# Altium PCB Strathim PCB V1.0 (1 try).PcbDoc (part 1 of 2)
Units mm, origin at the board's own origin, x right, y up, seen from the top; angles counter-clockwise.
Board outline 35 x 35 mm, 6 copper layers (Component Side, Ground Plane (GND), Inner Layer 1, Inner Layer 2, Power Plane (VCC), Solder Side), stack 1.297 mm thick; 113 components, 148 nets, 686 pads, 197 vias.
Unrouted connection lines stored in the file: 260.
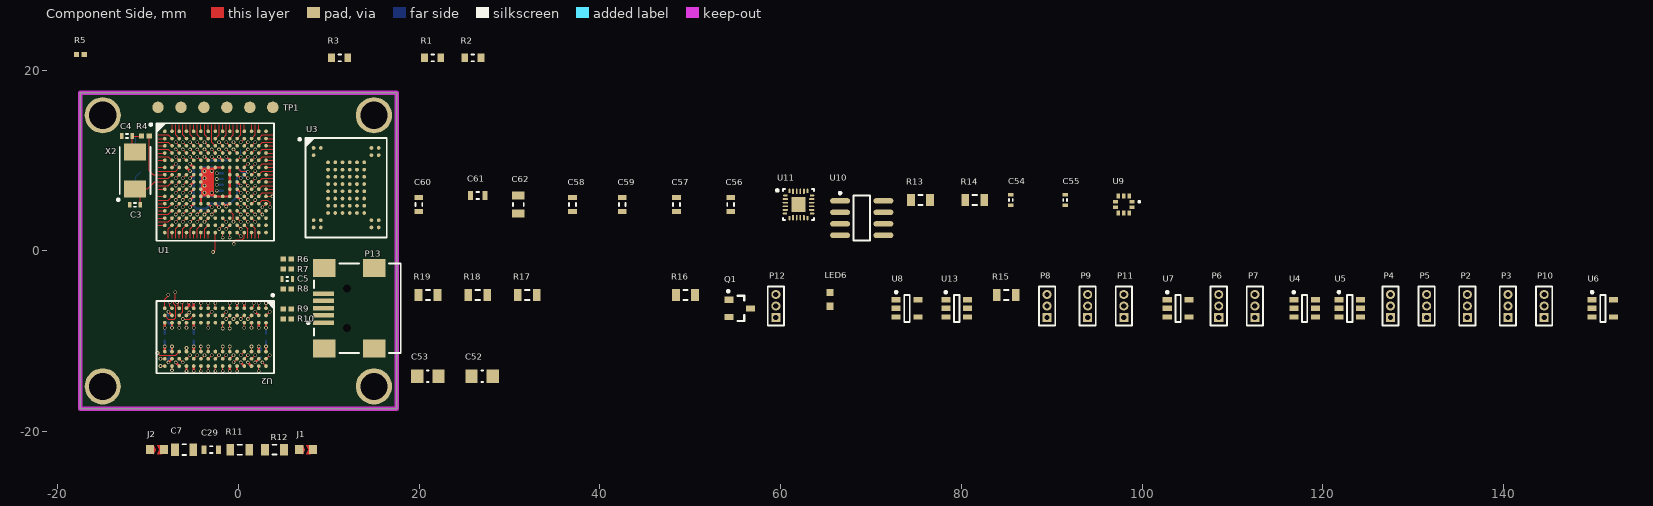
[diagram p0: Component Side view]
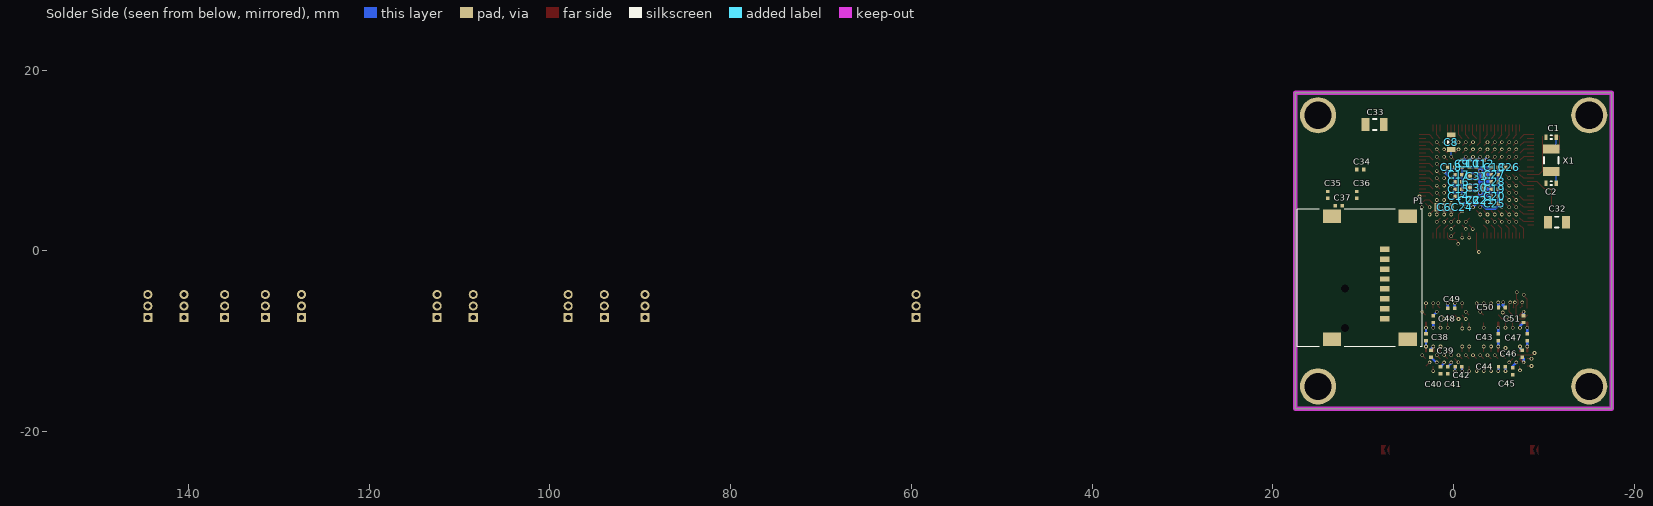
[diagram p1: Solder Side view, seen from below]
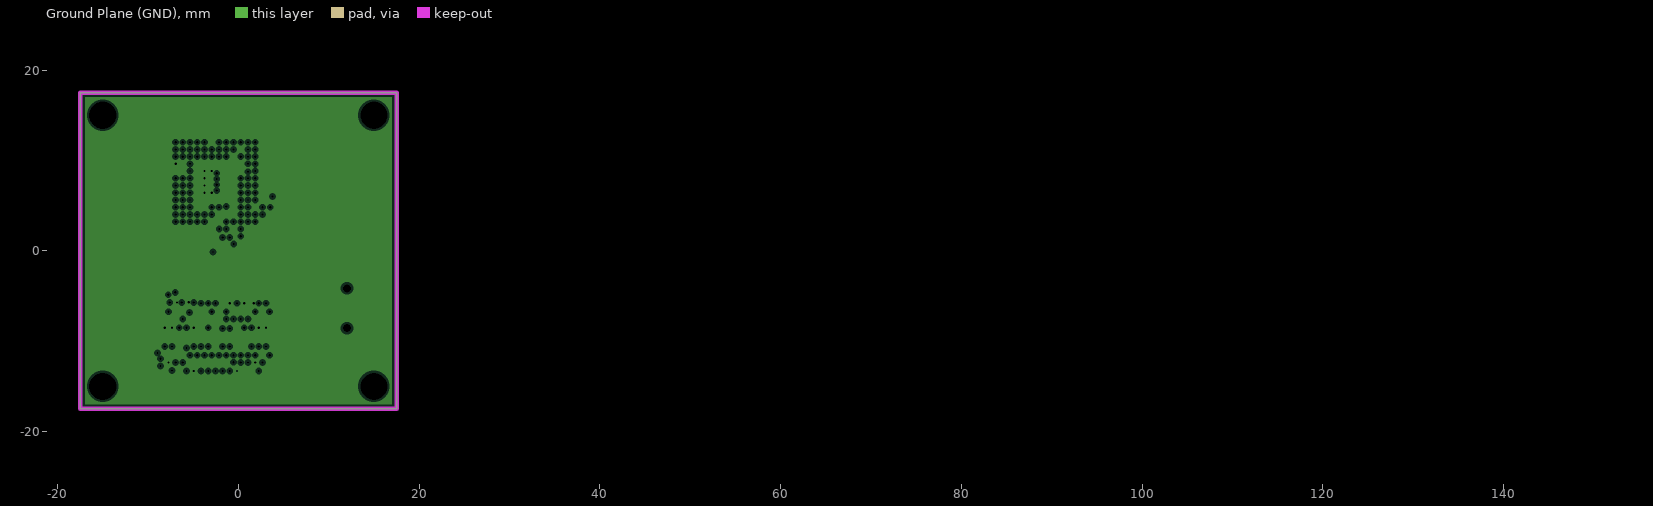
[diagram p2: Ground Plane (GND), clearances drawn from the general rule]
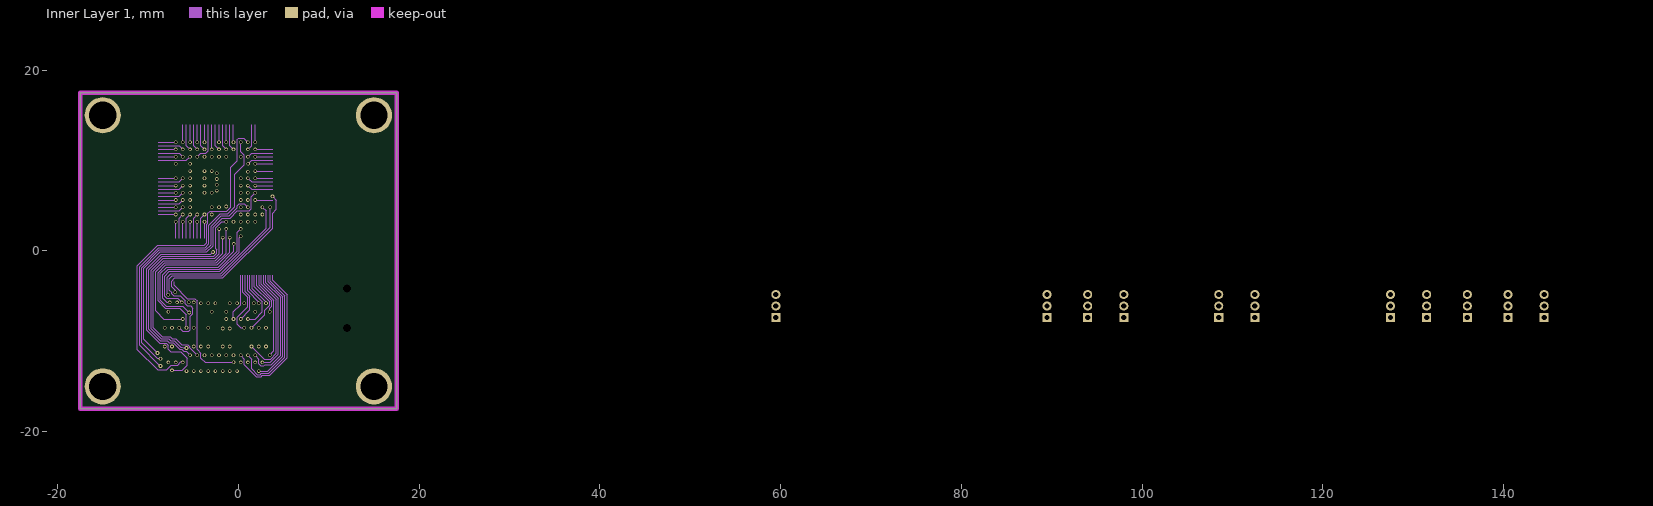
[diagram p3: Inner Layer 1]
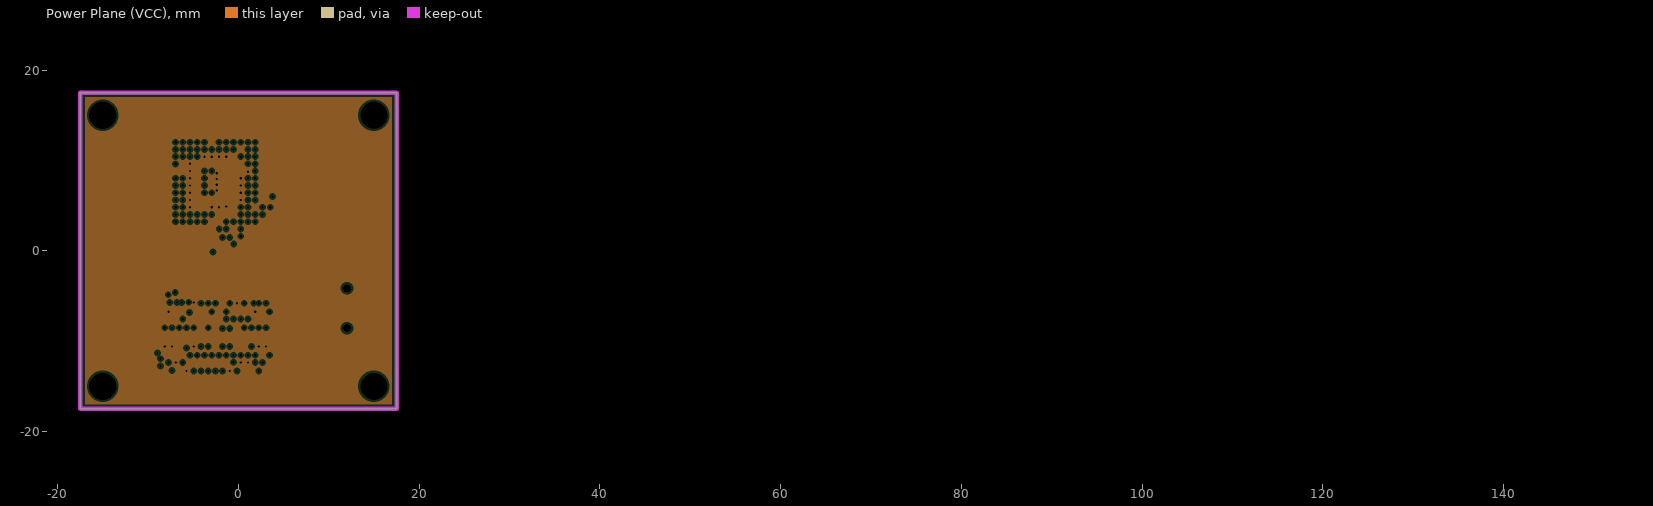
[diagram p4: Power Plane (VCC), clearances drawn from the general rule]

## Layer stack, top to bottom
Top Solder: solder mask 0.0102, Solder Resist, Dk 3.5
Component Side: signal copper 0.0356
Dielectric 1: core 0.32, FR-4, Dk 4.8
Ground Plane (GND): plane copper 0.036, net GND
Dielectric 3: prepreg 0.127, Dk 4.2
Inner Layer 1: signal copper 0.036
Dielectric 6: core 0.254, Dk 4.2
Inner Layer 2: signal copper 0.036
Dielectric 5: prepreg 0.127, Dk 4.2
Power Plane (VCC): plane copper 0.036, net +3V3
Dielectric 4: core 0.254, Dk 4.2
Solder Side: signal copper 0.0356
Bottom Solder: solder mask 0.0102, Solder Resist, Dk 3.5

## Board outline
-17.5,-17.5 17.5,-17.5 17.5,17.5 -17.5,17.5

## Design rules (kind name [scope] priority, off if disabled: settings)
Clearance [All] p1: gap=0.12
DiffPairsRouting [All] p1: maxlimit=0.254 minlimit=0.254 mostfreqgap=0.254 toplayer_minwidth=0.381 toplayer_maxwidth=0.381 toplayer_prefwidth=0.381 midlayer1_minwidth=0.381 midlayer1_maxwidth=0.381 midlayer1_prefwidth=0.381 midlayer2_minwidth=0.381 midlayer2_maxwidth=0.381 midlayer2_prefwidth=0.381 bottomlayer_minwidth=0.381 bottomlayer_maxwidth=0.381 bottomlayer_prefwidth=0.381 maxuncoupledlength=12.7
PlaneClearance [All] p1: clearance=0.25
PlaneConnect [All] p1: planeconnectstyle=Direct reliefexpansion=0.508 reliefentries=4 reliefconductorwidth=0.254 reliefairgap=0.254
PolygonConnect PolygonConnect_GND [InNet('GND') vs IsVia] p1: connectstyle=Direct reliefconductorwidth=0.254 reliefentries=4 polygonreliefangle="90 Angle" airgapwidth=0.254
PolygonConnect [All] p2: connectstyle=Relief reliefconductorwidth=0.254 reliefentries=4 polygonreliefangle="90 Angle" airgapwidth=0.254
RoutingVias [All] p1: holewidth=0.2 width=0.4 viastyle="Through Hole" minholewidth=0.25 minwidth=0.4 maxholewidth=0.4 maxwidth=0.8
SolderMaskExpansion [All] p1: expansion=0.102
Width [All] p1: maxlimit=2 minlimit=0.12 preferedwidth=0.12
27 further rules are at their usual default settings.

## Classes and differential pairs
component class MCU: C1 C2 C3 C4 C5 C? P1 R1 R2 R3 R4 R5 R6 R7 R8 R9 R10 R? TP1 U1 X1 X2 X?
component class RAM: C34 C35 C36 C37 C38 C39 C40 C41 C42 C43 C44 C45 C46 C47 C48 C49 C50 C51 C52 C53 U2 U3
net class RAM: NAND_ALE NAND_CLE NAND_NCE NAND_NR/B NAND_NRE NAND_NWE NAND_NWP NetC4_2 NetR4_1 QUADSPI_BK1_IO2 RAM_ADDR0 RAM_ADDR1 RAM_ADDR2 RAM_ADDR3 RAM_ADDR4 RAM_ADDR5 RAM_ADDR6 RAM_ADDR7 RAM_ADDR8 RAM_ADDR9 RAM_ADDR10 RAM_ADDR11 RAM_I/O0 RAM_I/O1 RAM_I/O2 RAM_I/O3 RAM_I/O4 RAM_I/O5 RAM_I/O6 RAM_I/O7 RAM_I/O8 RAM_I/O9 RAM_I/O10 RAM_I/O11 RAM_I/O12 RAM_I/O13 RAM_I/O14 RAM_I/O15 RAM_I/O16 RAM_I/O17 RAM_I/O18 RAM_I/O19 RAM_I/O20 RAM_I/O21 RAM_I/O22 RAM_I/O23 RAM_I/O24 RAM_I/O25 RAM_I/O26 RAM_I/O27 RAM_I/O28 RAM_I/O29 RAM_I/O30 RAM_I/O31 SDRAM_BA0 SDRAM_BA1 SDRAM_CKE SDRAM_CLK SDRAM_DQM0 SDRAM_DQM1 SDRAM_DQM2 SDRAM_DQM3 SDRAM_NCAS SDRAM_NCS SDRAM_NRAS
net class SDMMC: SDMMC_CK SDMMC_CMD SDMMC_D0 SDMMC_D1 SDMMC_D2 SDMMC_D3
component class PWR: C6 C7 C8 C9 C10 C11 C12 C13 C14 C15 C16 C17 C18 C19 C20 C21 C22 C23 C24 C25 C26 C27 C28 C29 C30 C31 C32 C33 C? J1 J2 J? R11 R12
component class Connectors: LED6 P2 P3 P4 P5 P6 P7 P8 P9 P10 P11 P12 P13 Q1 R15 R16 R17 R18 R19 U4 U5 U6 U7 U8 U13
component class IMU: C54 C55 C56 C57 C58 C59 C60 C61 C62 R13 R14 U9 U10 U11 U12
net class TWI: EEPROM_NWC I2C1_SCL I2C1_SDA
differential pair USB_HS: +USB_HS_P -USB_HS_N
differential pair USBCON: +USBCON_P -USBCON_N

## Components (designator, comment, footprint, x,y, rotation, side; value= is the part's Value field where it differs from the comment)
C1 "ChipCap 12 NP0" CAP0402 -10.795,12.573 r180 bottom
C2 "ChipCap 12 NP0" CAP0402 -10.795,7.493 r180 bottom
C3 "ChipCap 18 NP0" CAP0402 -11.43,5.08 r0 top
C4 "ChipCap 18 NP0" CAP0402 -12.319,12.7 r0 top
C5 "ChipCap 0.1u X7R" CAP0402 5.41,-3.12 r0 top
C6 "ChipCap 22u X7R" CAP0603 1.06,4.82 r180 bottom
C7 "ChipCap 22u X7R" CAP0805#1 -6,-22 r0 top
C8 "ChipCap 22u X7R" CAP0603 0.26,12.02 r270 bottom
C9 "ChipCap 0.1u X7R" CAP0201 -0.94,9.62 r90 bottom
C10 "ChipCap 0.1u X7R" CAP0201 -1.74,9.62 r90 bottom
C11 "ChipCap 0.1u X7R" CAP0201 -2.54,9.62 r90 bottom
C12 "ChipCap 0.1u X7R" CAP0201 -3.34,9.62 r90 bottom
C13 "ChipCap 0.1u X7R" CAP0201 -4.54,9.22 r180 bottom
C14 "ChipCap 0.1u X7R" CAP0201 -0.54,6.02 r0 bottom
C15 "ChipCap 0.1u X7R" CAP0201 -0.54,6.82 r0 bottom
C16 "ChipCap 0.1u X7R" CAP0201 -0.54,7.62 r0 bottom
C17 "ChipCap 0.1u X7R" CAP0201 -0.54,8.42 r0 bottom
C18 "ChipCap 0.1u X7R" CAP0201 0.26,9.22 r180 bottom
C19 "ChipCap 0.1u X7R" CAP0201 -4.54,6.82 r180 bottom
C20 "ChipCap 0.1u X7R" CAP0201 -4.54,6.02 r180 bottom
C21 "ChipCap 0.1u X7R" CAP0201 -3.34,5.62 r270 bottom
C22 "ChipCap 0.1u X7R" CAP0201 -2.54,5.62 r270 bottom
C23 "ChipCap 0.1u X7R" CAP0201 -1.74,5.62 r270 bottom
C24 "ChipCap 0.1u X7R" CAP0201 -0.94,4.82 r90 bottom
C25 "ChipCap 0.1u X7R" CAP0201 -4.54,5.22 r180 bottom
C26 "ChipCap 0.1u X7R" CAP0201 -6.14,9.22 r0 bottom
C27 "ChipCap 0.1u X7R" CAP0201 -4.54,8.42 r180 bottom
C28 "ChipCap 0.1u X7R" CAP0201 -4.54,7.62 r180 bottom
C29 "ChipCap 0.1u X7R" CAP0603 -3,-22 r0 top
C30 "ChipCap 22u X7R" CAP0603 -2.54,6.98 r180 bottom
C31 "ChipCap 22u X7R" CAP0603 -2.54,8.26 r180 bottom
C32 "ChipCap 22u X7R" CAP0805#1 -11.43,3.175 r180 bottom
C33 "ChipCap 22u X7R" CAP0805#1 8.75,13.97 r0 bottom
C34 "ChipCap 0.1u X7R" CAP0201 10.325,8.985 r180 bottom
C35 "ChipCap 0.1u X7R" CAP0201 13.925,6.185 r270 bottom
C36 "ChipCap 0.1u X7R" CAP0201 10.725,6.185 r90 bottom
C37 "ChipCap 0.1u X7R" CAP0201 12.725,4.985 r180 bottom
C38 "ChipCap 0.1u X7R" CAP0201 3.06,-9.55 r270 bottom
C39 "ChipCap 0.1u X7R" CAP0201 2.5,-11.39 r90 bottom
C40 "ChipCap 0.1u X7R" CAP0201 1.46,-13.23 r90 bottom
C41 "ChipCap 0.1u X7R" CAP0201 0.66,-13.23 r90 bottom
C42 "ChipCap 0.1u X7R" CAP0201 -0.54,-12.83 r180 bottom
C43 "ChipCap 0.1u X7R" CAP0201 -4.94,-9.55 r270 bottom
C44 "ChipCap 0.1u X7R" CAP0201 -5.34,-12.83 r180 bottom
C45 "ChipCap 0.1u X7R" CAP0201 -6.54,-13.31 r90 bottom
C46 "ChipCap 0.1u X7R" CAP0201 -7.58,-11.39 r90 bottom
C47 "ChipCap 0.1u X7R" CAP0201 -8.14,-9.55 r270 bottom
C48 "ChipCap 0.1u X7R" CAP0201 2.26,-7.55 r90 bottom
C49 "ChipCap 0.1u X7R" CAP0201 0.26,-6.35 r180 bottom
C50 "ChipCap 0.1u X7R" CAP0201 -5.34,-6.27 r0 bottom
C51 "ChipCap 0.1u X7R" CAP0201 -7.74,-7.55 r90 bottom
C52 "ChipCap 10u X7R" CAP0805#2 26.975,-13.875 r0 top
C53 "ChipCap 10u X7R" CAP0805#2 20.975,-13.875 r0 top
C54 "ChipCap 0.1u X7R" CAP0402 85.475,5.625 r90 top
C55 "ChipCap 0.1u X7R" CAP0402 91.475,5.625 r90 top
C56 "ChipCap 0.1u X7R" CAP0603 54.475,5.125 r90 top
C57 "ChipCap 0.1u X7R" CAP0603 48.475,5.125 r90 top
C58 "ChipCap 0.1u X7R" CAP0603 36.975,5.125 r90 top
C59 "ChipCap 0.1u X7R" CAP0603 42.475,5.125 r90 top
C60 "ChipCap 1u X7R" CAP0603 19.975,5.125 r90 top
C61 "ChipCap 1u X7R" CAP0603 26.475,6.125 r0 top
C62 "ChipCap 10u X7R" CAP0805#1 30.975,5.125 r90 top
J1 "Jumper" J0603 7.5,-22 r0 top
J2 "Jumper" J0603 -9,-22 r0 top
LED6 "LED 0603" "LED 0603" 65.475,-5.375 r90 top
P1 "Micro SD Card Connector" "WR-CRD SD Micro" 13.48,-9.79 r90 bottom
P2 "MHDR1X3" MHDR1X3 135.975,-7.375 r90 top
P3 "MHDR1X3" MHDR1X3 140.475,-7.375 r90 top
P4 "MHDR1X3" MHDR1X3 127.475,-7.375 r90 top
P5 "MHDR1X3" MHDR1X3 131.475,-7.375 r90 top
P6 "MHDR1X3" MHDR1X3 108.475,-7.375 r90 top
P7 "MHDR1X3" MHDR1X3 112.475,-7.375 r90 top
P8 "MHDR1X3" MHDR1X3 89.475,-7.375 r90 top
P9 "MHDR1X3" MHDR1X3 93.975,-7.375 r90 top
P10 "MHDR1X3" MHDR1X3 144.475,-7.375 r90 top
P11 "MHDR1X3" MHDR1X3 97.975,-7.375 r90 top
P12 "MHDR1X3" MHDR1X3 59.475,-7.375 r90 top
P13 "mini-USB" USB/SM0.8-6H5 17.272,-6.35 r0 top
Q1 "BC847B" SOT23 55.475,-6.375 r0 top
R1 "RES0603 10K 1%" RES0603 21.503,21.343 r0 top
R2 "RES0603 10K 1%" RES0603 25.948,21.343 r0 top
R3 "RES0603 10K 1%" RES0603 11.216,21.343 r0 top
R4 "RES0402 330R 1%" RES0402 -10.287,12.7 r180 top
R5 "RES0402 10K 1%" RES0402 -17.486,21.724 r0 top
R6 "RES0402 10K 1%" RES0402 5.41,-0.92 r180 top
R7 "RES0402 10K 1%" RES0402 5.41,-2.02 r180 top
R8 "RES0402 10K 1%" RES0402 5.41,-4.22 r180 top
R9 "RES0402 10K 1%" RES0402 5.41,-6.42 r180 top
R10 "RES0402 10K 1%" RES0402 5.41,-7.52 r180 top
R11 "ChipRes 10K 1%" RES0805 0.155,-22.015 r0 top
R12 "ChipRes 10K 1%" RES0805 4,-22 r0 top
R13 "ChipRes 10K 1%" RES0805 75.475,5.625 r0 top
R14 "ChipRes 10K 1%" RES0805 81.475,5.625 r0 top
R15 "ChipRes 330R 1%" RES0805 84.975,-4.875 r0 top
R16 "ChipRes 47K 1%" RES0805 49.475,-4.875 r0 top
R17 "ChipRes" RES0805 31.975,-4.875 r0 top
R18 "ChipRes" RES0805 26.475,-4.875 r0 top
R19 "ChipRes" RES0805 20.975,-4.875 r0 top
TP1 "Test Point 5x2" PG-1.5-13.5-6P-2.54PH 3.81,15.875 r270 top
U1 "STM32F746NGH6" TFBGA216 -2.54,7.62 r0 top
U2 "MT48LC4M32B2B5-6A IT:L" VFBGA-90 -2.54,-9.55 r270 top
U3 "MT29F1G08ABADAH4-IT:D" "VFBGA-63 (H4 9x11)" 11.925,6.985 r0 top
U4 "SRV05" SOT23-6 117.975,-6.375 r0 top
U5 "SRV05" SOT23-6 122.975,-6.375 r0 top
U6 "TPD2E001" SOT23-5 150.975,-6.375 r0 top
U7 "TPD2E001" SOT23-5 103.975,-6.375 r0 top
U8 "TPD2E001" SOT23-5 73.975,-6.375 r0 top
U9 "LPS22H" HLGA-10L 97.975,5.125 r0 top
U10 "M24256" SOIC8 68.975,3.625 r0 top
U11 "MPU-9250" QFN24 61.975,5.125 r0 top
U13 "SRV05" SOT23-6 79.475,-6.375 r0 top
X1 "XTAL" KX-327NHT -10.795,10.025 r270 bottom
X2 "XTAL" "ABM3 Ceramic Crystal" -11.43,8.89 r90 top

## Footprints (in the part's own frame and the unit in brackets; to place one, negate y for a bottom-side part, rotate by r counter-clockwise, add the part's x,y. Pads: shape width x height; smd on the part's side, far side on the other; paste and mask are expansions set on the pad)
"ABM3 Ceramic Crystal" [mm]
  rect 1.9x2.4 smd: 1(-2.05,0) 2(2.05,0)
  silkscreen extent -3.37,-1.7 2.6,1.97, body extent -2.5,-1.6 2.5,1.6, height 1.3
CAP0201 [mm] "Chip Capacitor, 2-Leads, Body 0.60x0.30mm, IPC Medium Density"
  rect 0.38x0.42 smd: 1(-0.38,0) 2(0.38,0)
  body extent -0.32,-0.17 0.32,0.17, height 0.5
CAP0402 [mm] "Chip Capacitor, 2-Leads, Body 1.00x0.50mm, IPC Medium Density"
  rect 0.38x0.62 smd: 1(-0.58,0) 2(0.58,0)
  silkscreen extent -0.1,-0.21 0.1,0.21, body extent -0.53,-0.28 0.53,0.28, height 0.5
CAP0603 [mm] "Chip Capacitor, 2-Leads, Body 1.60x0.80mm, IPC Medium Density"
  rect 0.55x0.95 smd: 1(-0.8,0) 2(0.8,0)
  silkscreen extent -0.15,-0.38 0.15,0.38, body extent -0.85,-0.45 0.85,0.45, height 0.8
CAP0805#1 [mm] "Chip Capacitor, 2-Leads, Body 2.00x1.25mm, IPC Medium Density"
  rect 0.85x1.4 smd: 1(-1,0) 2(1,0)
  silkscreen extent -0.2,-0.6 0.2,0.6, body extent -1.05,-0.67 1.05,0.67, height 0.6
CAP0805#2 [mm]
  rect 1.35x1.45 smd: 1(-1.175,0) 2(1.175,0)
  silkscreen extent -0.1,-0.63 0.1,0.63, body extent -1,-0.62 1,0.63, height 0.3
HLGA-10L [mm]
  rect 0.55x0.4 smd: 1(0.92,0.3) 2(0.92,-0.3) 6(-0.92,-0.3) 7(-0.92,0.3)
  rect 0.4x0.55 smd: 3(0.6,-0.92) 4(0,-0.92) 5(-0.6,-0.92) 8(-0.6,0.92) 9(0,0.92) 10(0.6,0.92)
  silkscreen extent 1.63,0.23 1.77,0.37
J0603 [mil]
  rect 35x40 smd: 1(-30,0) 2(30,0)
  Component Side region: -15,-20 -15,20 -5,0
  Component Side region: 0,20 10,0 0,-20 20,-20 20,20
KX-327NHT [mm] "Quartz Crystal 32.768KHz"
  rect 1x1.8 smd: 1(-1.25,0) 2(1.25,0)
  silkscreen extent -0.35,-0.8 0.35,0.8, body extent -1.6,-0.75 1.6,0.75, height 0.71
"LED 0603" [mm]
  rect 0.8x0.8 smd: 1(-0.75,0) 2(0.75,0)
  body extent -0.85,-0.45 0.85,0.45, height 0.9
MHDR1X3 [mm] "Connector; Header; 3 Position"
  rect 1x1 hole 0.6: 1(0,0)
  round 1 hole 0.6: 2(1.27,0) 3(2.54,0)
  silkscreen extent -0.9,-0.9 3.44,0.9
PG-1.5-13.5-6P-2.54PH [mm]
  round 1.27 smd paste-2: 1(0,0) 2(0,-2.54) 3(0,-5.08) 4(0,-7.62) 5(0,-10.16) 6(0,-12.7)
QFN24 [mm] "QFN, 24-Leads, Body 3.00x3.00mm, Pitch 0.40mm, Thermal Pad 1.54x1.70mm, IPC High Density"
  oval 0.5x0.2 smd: 1(-1.45,1) 6(-1.5,-1) 13(1.5,-1) 18(1.5,1)
  oval 0.6x0.2 smd: 2(-1.45,0.6) 3(-1.45,0.2) 4(-1.45,-0.2) 5(-1.45,-0.6) 14(1.45,-0.6) 15(1.45,-0.2) 16(1.45,0.2) 17(1.45,0.6)
  oval 0.2x0.5 smd: 7(-1,-1.5) 12(1,-1.5) 19(1,1.5) 24(-1,1.5)
  oval 0.2x0.6 smd: 8(-0.6,-1.45) 9(-0.2,-1.45) 10(0.2,-1.45) 11(0.6,-1.45) 20(0.6,1.45) 21(0.2,1.45) 22(-0.2,1.45) 23(-0.6,1.45)
  rect 1.54x1.7 smd: 25(0,0)
  silkscreen extent -2.47,-1.7 1.7,1.7, body extent -1.55,-1.55 1.55,1.55, height 1
RES0402 [mm] "Chip Resistor, 2-Leads, Body 1.00x0.50mm, IPC Medium Density"
  rect 0.6x0.55 smd: 1(-0.425,0) 2(0.425,0)
  body extent -0.53,-0.28 0.53,0.28, height 0.35
RES0603 [mm] "Chip Resistor, 2-Leads, Body 1.60x0.85mm, IPC Medium Density"
  rect 0.75x0.95 smd: 1(-0.9,0) 2(0.9,0)
  silkscreen extent -0.15,-0.38 0.15,0.38, body extent -0.84,-0.42 0.8,0.42, height 0.46
RES0805 [mm] "Chip Resistor, 2-Leads, Body 2.00x1.27mm, IPC Medium Density"
  rect 0.85x1.3 smd: 1(-1.05,0) 2(1.05,0)
  silkscreen extent -0.25,-0.55 0.25,0.55, body extent -1.15,-0.67 1.15,0.68, height 0.76
SOIC8 [mm] "SOIC, 8-Leads, Body 4,90x3,90mm, Pitch 1,27mm, IPC Medium Density"
  oval 2.2x0.6 smd: 1(-2.4,1.905) 2(-2.4,0.635) 3(-2.4,-0.635) 4(-2.4,-1.905) 5(2.4,-1.905) 6(2.4,-0.635) 7(2.4,0.635) 8(2.4,1.905)
  silkscreen extent -2.52,-2.5 0.9,2.88, body extent -3,-2.45 3,2.45, height 1.61
SOT23 [mm]
  rect 1x0.7 smd: 1(-1.2,0.95) 2(-1.2,-0.95) 3(1.2,0)
  silkscreen extent -1.4,-1.4 0.51,2.03, body extent -1.25,-1.5 1.25,1.5, height 1.09
SOT23-5 [mm] "SOT23, 5-Leads, Body 2.90x2.45mm, Pitch 0.95mm, IPC Medium Density"
  rect 1x0.6 smd: 1(-1.2,0.95) 2(-1.2,0) 3(-1.2,-0.95) 4(1.2,-0.95) 5(1.2,0.95)
  silkscreen extent -1.32,-1.5 0.3,1.92, body extent -1.4,-1.45 1.4,1.45, height 1.24
SOT23-6 [mm] "SOT23, 5-Leads, Body 2.90x2.45mm, Pitch 0.95mm, IPC Medium Density"
  rect 1x0.6 smd: 1(-1.2,0.95) 2(-1.2,0) 3(-1.2,-0.95) 4(1.2,-0.95) 5(1.2,0) 6(1.2,0.95)
  silkscreen extent -1.32,-1.5 0.3,1.92, body extent -1.4,-1.45 1.4,1.45, height 1.24
TFBGA216 [mm] "BGA, 216-Leads, Body 13,00x13,00mmx1,10mm, Pitch 0,80mm"
  round 0.4 smd: A1(-5.6,5.6) A2(-4.8,5.6) A3(-4,5.6) A4(-3.2,5.6) A5(-2.4,5.6) A6(-1.6,5.6) A7(-0.8,5.6) A8(0,5.6) A9(0.8,5.6) A10(1.6,5.6) A11(2.4,5.6) A12(3.2,5.6) A13(4,5.6) A14(4.8,5.6) A15(5.6,5.6) B1(-5.6,4.8) B2(-4.8,4.8) B3(-4,4.8) B4(-3.2,4.8) B5(-2.4,4.8) B6(-1.6,4.8) B7(-0.8,4.8) B8(0,4.8) B9(0.8,4.8) B10(1.6,4.8) B11(2.4,4.8) B12(3.2,4.8) B13(4,4.8) B14(4.8,4.8) B15(5.6,4.8) C1(-5.6,4) C2(-4.8,4) C3(-4,4) C4(-3.2,4) C5(-2.4,4) C6(-1.6,4) C7(-0.8,4) C8(0,4) C9(0.8,4) C10(1.6,4) C11(2.4,4) C12(3.2,4) C13(4,4) C14(4.8,4) C15(5.6,4) D1(-5.6,3.2) D2(-4.8,3.2) D3(-4,3.2) D4(-3.2,3.2) D5(-2.4,3.2) D6(-1.6,3.2) D7(-0.8,3.2) D8(0,3.2) D9(0.8,3.2) D10(1.6,3.2) D11(2.4,3.2) D12(3.2,3.2) D13(4,3.2) D14(4.8,3.2) D15(5.6,3.2) E1(-5.6,2.4) E2(-4.8,2.4) E3(-4,2.4) E4(-3.2,2.4) E5(-2.4,2.4) E6(-1.6,2.4) E7(-0.8,2.4) E8(0,2.4) E9(0.8,2.4) E10(1.6,2.4) E11(2.4,2.4) E12(3.2,2.4) E13(4,2.4) E14(4.8,2.4) E15(5.6,2.4) F1(-5.6,1.6) F2(-4.8,1.6) F3(-4,1.6) F4(-3.2,1.6) F5(-2.4,1.6) F6(-1.6,1.6) F7(-0.8,1.6) F8(0,1.6) F9(0.8,1.6) F10(1.6,1.6) F11(2.4,1.6) F12(3.2,1.6) F13(4,1.6) F14(4.8,1.6) F15(5.6,1.6) G1(-5.6,0.8) G2(-4.8,0.8) G3(-4,0.8) G4(-3.2,0.8) G5(-2.4,0.8) G6(-1.6,0.8) G10(1.6,0.8) G11(2.4,0.8) G12(3.2,0.8) G13(4,0.8) G14(4.8,0.8) G15(5.6,0.8) H1(-5.6,0) H2(-4.8,0) H3(-4,0) H4(-3.2,0) H5(-2.4,0) H6(-1.6,0) H10(1.6,0) H11(2.4,0) H12(3.2,0) H13(4,0) H14(4.8,0) H15(5.6,0) J1(-5.6,-0.8) J2(-4.8,-0.8) J3(-4,-0.8) J4(-3.2,-0.8) J5(-2.4,-0.8) J6(-1.6,-0.8) J10(1.6,-0.8) J11(2.4,-0.8) J12(3.2,-0.8) J13(4,-0.8) J14(4.8,-0.8) J15(5.6,-0.8) K1(-5.6,-1.6) K2(-4.8,-1.6) K3(-4,-1.6) K4(-3.2,-1.6) K5(-2.4,-1.6) K6(-1.6,-1.6) K7(-0.8,-1.6) K8(0,-1.6) K9(0.8,-1.6) K10(1.6,-1.6) K11(2.4,-1.6) K12(3.2,-1.6) K13(4,-1.6) K14(4.8,-1.6) K15(5.6,-1.6) L1(-5.6,-2.4) L2(-4.8,-2.4) L3(-4,-2.4) L4(-3.2,-2.4) L5(-2.4,-2.4) L6(-1.6,-2.4) L7(-0.8,-2.4) L8(0,-2.4) L9(0.8,-2.4) L10(1.6,-2.4) L11(2.4,-2.4) L12(3.2,-2.4) L13(4,-2.4) L14(4.8,-2.4) L15(5.6,-2.4) M1(-5.6,-3.2) M2(-4.8,-3.2) M3(-4,-3.2) M4(-3.2,-3.2) M5(-2.4,-3.2) M6(-1.6,-3.2) M7(-0.8,-3.2) M8(0,-3.2) M9(0.8,-3.2) M10(1.6,-3.2) M11(2.4,-3.2) M12(3.2,-3.2) M13(4,-3.2) M14(4.8,-3.2) M15(5.6,-3.2) N1(-5.6,-4) N2(-4.8,-4) N3(-4,-4) N4(-3.2,-4) N5(-2.4,-4) N6(-1.6,-4) N7(-0.8,-4) N8(0,-4) N9(0.8,-4) N10(1.6,-4) N11(2.4,-4) N12(3.2,-4) N13(4,-4) N14(4.8,-4) N15(5.6,-4) P1(-5.6,-4.8) P2(-4.8,-4.8) P3(-4,-4.8) P4(-3.2,-4.8) P5(-2.4,-4.8) P6(-1.6,-4.8) P7(-0.8,-4.8) P8(0,-4.8) P9(0.8,-4.8) P10(1.6,-4.8) P11(2.4,-4.8) P12(3.2,-4.8) P13(4,-4.8) P14(4.8,-4.8) P15(5.6,-4.8) R1(-5.6,-5.6) R2(-4.8,-5.6) R3(-4,-5.6) R4(-3.2,-5.6) R5(-2.4,-5.6) R6(-1.6,-5.6) R7(-0.8,-5.6) R8(0,-5.6) R9(0.8,-5.6) R10(1.6,-5.6) R11(2.4,-5.6) R12(3.2,-5.6) R13(4,-5.6) R14(4.8,-5.6) R15(5.6,-5.6)
  silkscreen extent -7.27,-6.5 6.5,6.5, body extent -6.5,-6.5 6.5,6.5, height 1.1
USB/SM0.8-6H5 [mm] "Connector; USB2.0, Type B, SM; 5 Position; Right Angle"
  rect 2.3x0.5 smd: 1(-7.85,-1.6) 2(-7.85,-0.8) 3(-7.85,0) 4(-7.85,0.8) 5(-7.85,1.6)
  rect 2.5x2 smd: 6(-7.75,4.45) 7(-2.25,4.45) 8(-7.75,-4.45) 9(-2.25,-4.45)
  round 0.6 hole 0.9 unplated: MH1(-5.25,2.2) MH2(-5.25,-2.2)
  silkscreen extent -9.67,-4.95 0.7,4.95, body extent -8.63,-5.35 0.57,5.35, height 3.95
"VFBGA-63 (H4 9x11)" [mm] "VFBGA, 63-Leads, Body 9.00x11.00mmx1.00mm, Pitch 0.80mm"
  round 0.41 smd: A1(-3.6,4.4) A2(-2.8,4.4) A9(2.8,4.4) A10(3.6,4.4) B1(-3.6,3.6) B9(2.8,3.6) B10(3.6,3.6) C3(-2,2.8) C4(-1.2,2.8) C5(-0.4,2.8) C6(0.4,2.8) C7(1.2,2.8) C8(2,2.8) D3(-2,2) D4(-1.2,2) D5(-0.4,2) D6(0.4,2) D7(1.2,2) D8(2,2) E3(-2,1.2) E4(-1.2,1.2) E5(-0.4,1.2) E6(0.4,1.2) E7(1.2,1.2) E8(2,1.2) F3(-2,0.4) F4(-1.2,0.4) F5(-0.4,0.4) F6(0.4,0.4) F7(1.2,0.4) F8(2,0.4) G3(-2,-0.4) G4(-1.2,-0.4) G5(-0.4,-0.4) G6(0.4,-0.4) G7(1.2,-0.4) G8(2,-0.4) H3(-2,-1.2) H4(-1.2,-1.2) H5(-0.4,-1.2) H6(0.4,-1.2) H7(1.2,-1.2) H8(2,-1.2) J3(-2,-2) J4(-1.2,-2) J5(-0.4,-2) J6(0.4,-2) J7(1.2,-2) J8(2,-2) K3(-2,-2.8) K4(-1.2,-2.8) K5(-0.4,-2.8) K6(0.4,-2.8) K7(1.2,-2.8) K8(2,-2.8) L1(-3.6,-3.6) L2(-2.8,-3.6) L9(2.8,-3.6) L10(3.6,-3.6) M1(-3.6,-4.4) M2(-2.8,-4.4) M9(2.8,-4.4) M10(3.6,-4.4)
  silkscreen extent -5.27,-5.5 4.5,5.5, body extent -4.5,-5.5 4.5,5.5, height 1
VFBGA-90 [mm] "VFBGA, 90-Leads, Body 8.00x13.00mmx1.00mm, Pitch 0.80mm"
  round 0.41 smd: A1(-3.2,5.6) A2(-2.4,5.6) A3(-1.6,5.6) A7(1.6,5.6) A8(2.4,5.6) A9(3.2,5.6) B1(-3.2,4.8) B2(-2.4,4.8) B3(-1.6,4.8) B7(1.6,4.8) B8(2.4,4.8) B9(3.2,4.8) C1(-3.2,4) C2(-2.4,4) C3(-1.6,4) C7(1.6,4) C8(2.4,4) C9(3.2,4) D1(-3.2,3.2) D2(-2.4,3.2) D3(-1.6,3.2) D7(1.6,3.2) D8(2.4,3.2) D9(3.2,3.2) E1(-3.2,2.4) E2(-2.4,2.4) E3(-1.6,2.4) E7(1.6,2.4) E8(2.4,2.4) E9(3.2,2.4) F1(-3.2,1.6) F2(-2.4,1.6) F3(-1.6,1.6) F7(1.6,1.6) F8(2.4,1.6) F9(3.2,1.6) G1(-3.2,0.8) G2(-2.4,0.8) G3(-1.6,0.8) G7(1.6,0.8) G8(2.4,0.8) G9(3.2,0.8) H1(-3.2,0) H2(-2.4,0) H3(-1.6,0) H7(1.6,0) H8(2.4,0) H9(3.2,0) J1(-3.2,-0.8) J2(-2.4,-0.8) J3(-1.6,-0.8) J7(1.6,-0.8) J8(2.4,-0.8) J9(3.2,-0.8) K1(-3.2,-1.6) K2(-2.4,-1.6) K3(-1.6,-1.6) K7(1.6,-1.6) K8(2.4,-1.6) K9(3.2,-1.6) L1(-3.2,-2.4) L2(-2.4,-2.4) L3(-1.6,-2.4) L7(1.6,-2.4) L8(2.4,-2.4) L9(3.2,-2.4) M1(-3.2,-3.2) M2(-2.4,-3.2) M3(-1.6,-3.2) M7(1.6,-3.2) M8(2.4,-3.2) M9(3.2,-3.2) N1(-3.2,-4) N2(-2.4,-4) N3(-1.6,-4) N7(1.6,-4) N8(2.4,-4) N9(3.2,-4) P1(-3.2,-4.8) P2(-2.4,-4.8) P3(-1.6,-4.8) P7(1.6,-4.8) P8(2.4,-4.8) P9(3.2,-4.8) R1(-3.2,-5.6) R2(-2.4,-5.6) R3(-1.6,-5.6) R7(1.6,-5.6) R8(2.4,-5.6) R9(3.2,-5.6)
  silkscreen extent -4.77,-6.5 4,6.5, body extent -4,-6.5 4,6.5, height 1
"WR-CRD SD Micro" [mm] "WR-CRD SD Micro Header 8"
  rect 1.5x2 smd: 0(0,-8.4) 0(0,0) 0(13.6,-8.4) 0(13.6,0)
  rect 0.6x1.05 smd: 1(2.27,-5.87) 2(3.37,-5.87) 3(4.47,-5.87) 4(5.57,-5.87) 5(6.67,-5.87) 6(7.77,-5.87) 7(8.87,-5.87) 8(9.97,-5.87)
  silkscreen extent -0.8,-10 14.4,3.8, body extent -0.5,-9.9 14.1,3.8, height 1.77

## Part data
C1 C2 C3 C4: "Surface-mount ceramic multilayer capacitor"
C5 C9 C10 C11 C12 C13 C14 C15 C16 C17 C18 C19 C20 C21 C22 C23 C24 C25 C26 C27 C28 C29 C34 C35 C36 C37 C38 C39 C40 C41 C42 C43 C44 C45 C46 C47 C48 C49 C50 C51 C54 C55 C56 C57 C58 C59: library part "ChipCap 0.1uF X7R", "Surface-mount ceramic multilayer capacitor"
C6 C7 C8 C30 C31 C32 C33: library part "ChipCap 22uF X7R", "Surface-mount ceramic multilayer capacitor"
C52 C53 C62: library part "ChipCap 10uF X7R", "Surface-mount ceramic multilayer capacitor"
C60 C61: library part "ChipCap 1uF X7R", "Surface-mount ceramic multilayer capacitor"
LED6: library part LED0603
P1: library part MicroSDHeader8
P2 P3 P4 P5 P6 P7 P8 P9 P10 P11 P12: "Header, 3-Pin"
P13: library part miniUSB
Q1: "SOT23 NPN Silicon Planar General Purpose Transistor"
R1 R2 R3 R4 R5 R6 R7 R8 R9 R10 R11 R12 R13 R14 R15 R16: "Think Film Chip resistor"
R17 R18 R19: "Chip resistor"
TP1: library part PG-1.5-13.5-6P-2.54PH
U1: "ARM Cortex M7, 462DMIPS, 1MB Flash"
U2: "SDRAM 128Mbit"
U3: "FLASH RAM 1Gbit"
U4 U5 U13: "Protection 6V 10A"
U6 U7 U8: "Low-Capacitance 2-Channel ESD-Protection for High-Speed Data Interfaces"
U9: "MEMS nano pressure sensor: 260-1260 hPa"
U10: "256 Kbit I2C EEPROM"
U11: "9-Axis sensor"
X1: library part "Crystall oscillator", "Quartz crystall oscillator"
X2: library part "ABM3 Ceramic SMD Crystal", "Quartz crystall oscillator"

## Free pads (board coordinates)
  round 4 hole 3 unplated: H0(-15,15) H1(15,15) H2(15,-15) H3(-15,-15)

## Via types
v1: diameter 0.4, hole 0.25, Component Side to Solder Side, tented both sides, 183 vias
v2: diameter 0.4, hole 0.25, Component Side to Solder Side, 14 vias

## Nets (pads, with @x,y where several pads share a name; then routed paths per layer and width w, separated by ;. In a path a pad name is that pad's centre, name@x,y a point inside that pad or via, vN(x,y) a via of type N, cw(c..) or ccw(c..) an arc to the next point about the centre after c; other vN are vias at no path point)
+3V3: C5.2 C7.1 C9.2 C10.2 C11.2 C12.2 C13.2 C14.2 C15.2 C16.2 C17.2 C18.2 C19.2 C20.2 C21.2 C22.2 C23.2 C24.2 C25.2 C26.2 C27.2 C28.2 C30.1 C31.1 C32.1 C33.1 C34.2 C35.2 C36.2 C37.2 C38.2 C39.2 C40.2 C41.2 C42.2 C43.2 C44.2 C45.2 C46.2 C47.2 C48.2 C49.2 C50.2 C51.2 C52.2 C53.2 C54.2 C55.2 C56.2 C57.2 C58.2 C60.2 C61.2 P1.5 R1.2 R2.2 R5.2 R6.2 R7.2 R8.2 R9.2 R10.2 R11.1 R12.1 R13.2 R14.2 R15.1 TP1.1 U1.C1 U1.E7 U1.E8 U1.E9 U1.E10 U1.F4 U1.F5 U1.F11 U1.G5 U1.G11 U1.H5 U1.H11 U1.J5 U1.J11 U1.K5 U1.K11 U1.L5 U1.L7 U1.L8 U1.L9 U1.L10 U2.A7 U2.B2 U2.B7 U2.C9 U2.D9 U2.E1 U2.F9 U2.L1 U2.L7 U2.M9 U2.N9 U2.P2 U2.P7 U2.R7 U3.D3 U3.G4 U3.H8 U3.J6 U9.1 U9.10 U10.8 U11.1 U11.8 U11.13 U11.22 | length 59.9
  Component Side w0.12: -8.86,11.62 U1.C1@-8.14,11.62 ; U1.F11@-0.14,9.22 0.28,8.8 1.015,8.8 v1(1.06,8.755)
  Component Side w0.254: U2.R7@-8.14,-11.15 v1(-8.14,-10.59) ; v1(-7.74,-6.75) U2.P2@-7.34,-7.15 ; U2.P7@-7.34,-11.15 v1(-7.34,-10.59) ; v1(-6.94,-12.35) U2.N9@-6.54,-12.75 ; v1(-5.74,-13.31) U2.M9@-5.74,-12.75 ; U1.F4@-5.74,9.22 v1(-5.34,8.82) ; v1(-5.34,4.82) U1.L5@-4.94,5.22 ; v1(-5.34,5.62) U1.K5@-4.94,6.02 ; v1(-5.34,6.42) U1.J5@-4.94,6.82 ; v1(-5.34,7.22) U1.H5@-4.94,7.62 ; v1(-5.34,8.02) U1.G5@-4.94,8.42 ; v1(-5.34,9.62) U1.F5@-4.94,9.22 ; U2.L7@-4.94,-11.15 v1(-4.94,-10.59) ; U2.L1@-4.94,-6.35 -5.076,-6.214 -4.94,-6.079 v1(-4.94,-5.71) ; v1(-3.74,10.42) U1.E7@-3.34,10.02 ; U1.L7@-3.34,5.22 v1(-2.94,4.82) ; v1(-2.94,10.42) U1.E8@-2.54,10.02 ; U1.L8@-2.54,5.22 v1(-2.14,4.82) ; v1(-2.14,10.42) U1.E9@-1.74,10.02 ; U1.L9@-1.74,5.22 -1.66,5.22 v1(-1.34,4.9) -1.02,5.22 U1.L10@-0.94,5.22 ; v1(-1.34,10.42) U1.E10@-0.94,10.02 ; v1(-0.94,-13.31) U2.F9@-0.94,-12.75 ; U2.E1@-0.14,-6.35 v1(-0.14,-5.79) ; U1.K11@-0.14,6.02 v1(0.26,5.62) ; U1.J11@-0.14,6.82 v1(0.26,6.42) ; U1.H11@-0.14,7.62 v1(0.26,7.22) ; U1.G11@-0.14,8.42 v1(0.26,8.02) ; v1(0.26,-12.35) U2.D9@0.66,-12.75 ; v1(1.06,-12.35) U2.C9@1.46,-12.75 ; v1(1.86,-6.75) U2.B2@2.26,-7.15 ; U2.B7@2.26,-11.15 v1(2.26,-10.59) ; U2.A7@3.06,-11.15 v1(3.06,-10.59)
  Solder Side w0.12: C26.2@-5.76,9.16 C26.2@-5.7,9.16
  Solder Side w0.254: v1(-8.14,-10.59) C47.2@-8.14,-9.93 ; C51.2@-7.74,-7.17 v1(-7.74,-6.75) ; C46.2@-7.58,-11.01 -7.34,-10.77 v1(-7.34,-10.59) ; v1(-6.94,-12.35) -6.54,-12.75 C45.2@-6.54,-12.93 ; C26.2@-5.76,9.16 C26.2@-5.76,9.2 ; C26.2@-5.76,9.22 -5.75,9.21 -5.7,9.16 -5.36,8.82 v1(-5.34,8.82) ; v1(-5.74,-13.31) -5.74,-12.77 C44.2@-5.72,-12.75 ; v1(-5.34,4.82) -4.94,5.22 C25.2@-4.92,5.22 ; v1(-5.34,5.62) -4.94,6.02 C20.2@-4.92,6.02 ; v1(-5.34,6.42) -4.94,6.82 C19.2@-4.92,6.82 ; v1(-5.34,7.22) -4.94,7.62 C28.2@-4.92,7.62 ; v1(-5.34,8.02) -5.32,8.02 C27.2@-4.92,8.42 ; v1(-5.34,9.62) -4.94,9.22 C13.2@-4.92,9.22 C27.2@-4.92,8.42 ; v1(-4.94,-10.59) C43.2@-4.94,-9.93 ; C50.2@-4.94,-6.33 -5.076,-6.194 -4.94,-6.059 v1(-4.94,-5.71) ; v1(-3.74,10.42) -3.34,10.02 C12.2@-3.34,10 C11.2@-2.54,10 ; v1(-2.94,4.82) C21.2@-3.34,5.22 ; v1(-2.94,10.42) -2.54,10.02 C11.2@-2.54,10 ; v1(-2.38,6.66) C30.1@-1.74,6.66 ; v1(-2.38,7.3) C30.1@-1.74,7.3 ; v1(-2.38,7.94) C31.1@-1.74,7.94 ; v1(-2.38,8.58) C31.1@-1.74,8.58 ; v1(-2.14,4.82) -2.54,5.22 C22.2@-2.54,5.24 ; v1(-2.14,10.42) -1.74,10.02 C10.2@-1.74,10 ; v1(-1.34,4.9) -1.34,5.22 -1.36,5.24 C23.2@-1.74,5.24 ; v1(-1.34,10.42) -0.94,10.02 C9.2@-0.94,10 ; v1(-0.94,-13.31) -0.92,-13.29 C42.2@-0.92,-12.83 ; C9.2@-0.9,10 C9.2@-0.94,10 ; v1(-0.14,-5.79) -0.12,-5.81 C49.2@-0.12,-6.35 ; C18.2@-0.12,9.22 0.345,8.755 v1(1.06,8.755) ; v1(0.26,-12.35) 0.26,-12.45 C41.2@0.66,-12.85 ; v1(0.26,5.62) 0.2,5.62 C14.2@-0.16,5.98 ; v1(0.26,6.42) 0.24,6.42 C15.2@-0.16,6.82 ; v1(0.26,7.22) -0.14,7.62 C16.2@-0.16,7.62 ; v1(1.06,-12.35) 1.06,-12.45 C40.2@1.46,-12.85 ; v1@1.068,8.748 0.34,8.02 v1(0.26,8.02) -0.14,8.42 C17.2@-0.16,8.42 C16.2@-0.16,7.62 ; v1(1.86,-6.75) 1.86,-6.77 C48.2@2.26,-7.17 ; v1(2.26,-10.59) 2.5,-10.83 C39.2@2.5,-11.01 ; v1(3.06,-10.59) C38.2@3.06,-9.93 ; C25.2@-4.92,5.22 C20.2@-4.92,6.02 ; C25.2@-4.92,5.22 -4.92,4.96 -4.62,4.66 -3.58,4.66 -3.34,4.9 C21.2@-3.34,5.22 ; C20.2@-4.92,6.02 C19.2@-4.92,6.82 ; C19.2@-4.92,6.82 C28.2@-4.92,7.62 ; C28.2@-4.92,7.62 C27.2@-4.92,8.42 ; C21.2@-3.34,5.22 C21.2@-3.34,5.24 C22.2@-2.54,5.24 ; C22.2@-2.54,5.24 C23.2@-1.74,5.24 ; C11.2@-2.54,10 C10.2@-1.74,10 ; C23.2@-1.74,5.24 -0.98,5.24 C24.2@-0.94,5.2 C14.2@-0.16,5.98 ; C10.2@-1.74,10 C9.2@-0.94,10 ; C14.2@-0.16,5.98 C14.2@-0.16,6.02 C15.2@-0.16,6.82 ; C15.2@-0.16,6.82 C16.2@-0.16,7.62
+5V: U6.1 U7.1 U8.1
ADC1_IMON: U1.N2 | length 1.6
  Component Side w0.12: -8.86,3.22 -7.82,3.22 ; -7.74,3.22 U1.N2@-7.34,3.62
ADC1_IN0: U1.R2 | length 0.6
  Component Side w0.12: -7.34,1.38 U1.R2@-7.34,2.02
ADC1_IN1: U1.B15 | length 0.7
  Component Side w0.12: U1.B15@3.06,12.42 3.78,12.42
ADC1_RSSI: U1.P2 | length 1.6
  Component Side w0.12: -7.74,1.38 -7.74,2.42 U1.P2@-7.34,2.82
ADC1_VMON: U1.N3 | length 2.4
  Component Side w0.12: v1(-6.94,3.22) U1.N3@-6.54,3.62
  Inner Layer 1 w0.12: -6.94,1.38 v1(-6.94,3.22)
ALT_CS: U1.B4 U9.6 | length 1.7
  Component Side w0.12: -6.14,13.94 -6.14,12.82 U1.B4@-5.74,12.42
ALT_INT: U9.7
ALT_MISO: U1.M4 U9.5 | length 3.4
  Component Side w0.12: v1(-6.14,4.02) U1.M4@-5.74,4.42
  Inner Layer 1 w0.12: -6.54,1.38 -6.54,3.62 v1(-6.14,4.02)
ALT_MOSI: U1.M3 U9.4 | length 2.4
  Component Side w0.12: v1(-6.94,4.02) U1.M3@-6.54,4.42
  Inner Layer 1 w0.12: -8.86,4.02 v1@-7.02,4.02
ALT_SCLK: U1.K14 U9.2 | length 1.7
  Component Side w0.12: U1.K14@2.26,6.02 2.66,6.42 3.78,6.42
AVCC: C29.2 U1.R1
EEPROM_NWC: U10.7